# Altium PCB mixer.PcbDoc
Units mm, origin at the board's own origin, x right, y up, seen from the top; angles counter-clockwise.
Board outline 37 x 27 mm, 2 copper layers (Top Layer, Bottom Layer), stack 1.671 mm thick; 24 components, 14 nets, 54 pads, 0 vias.
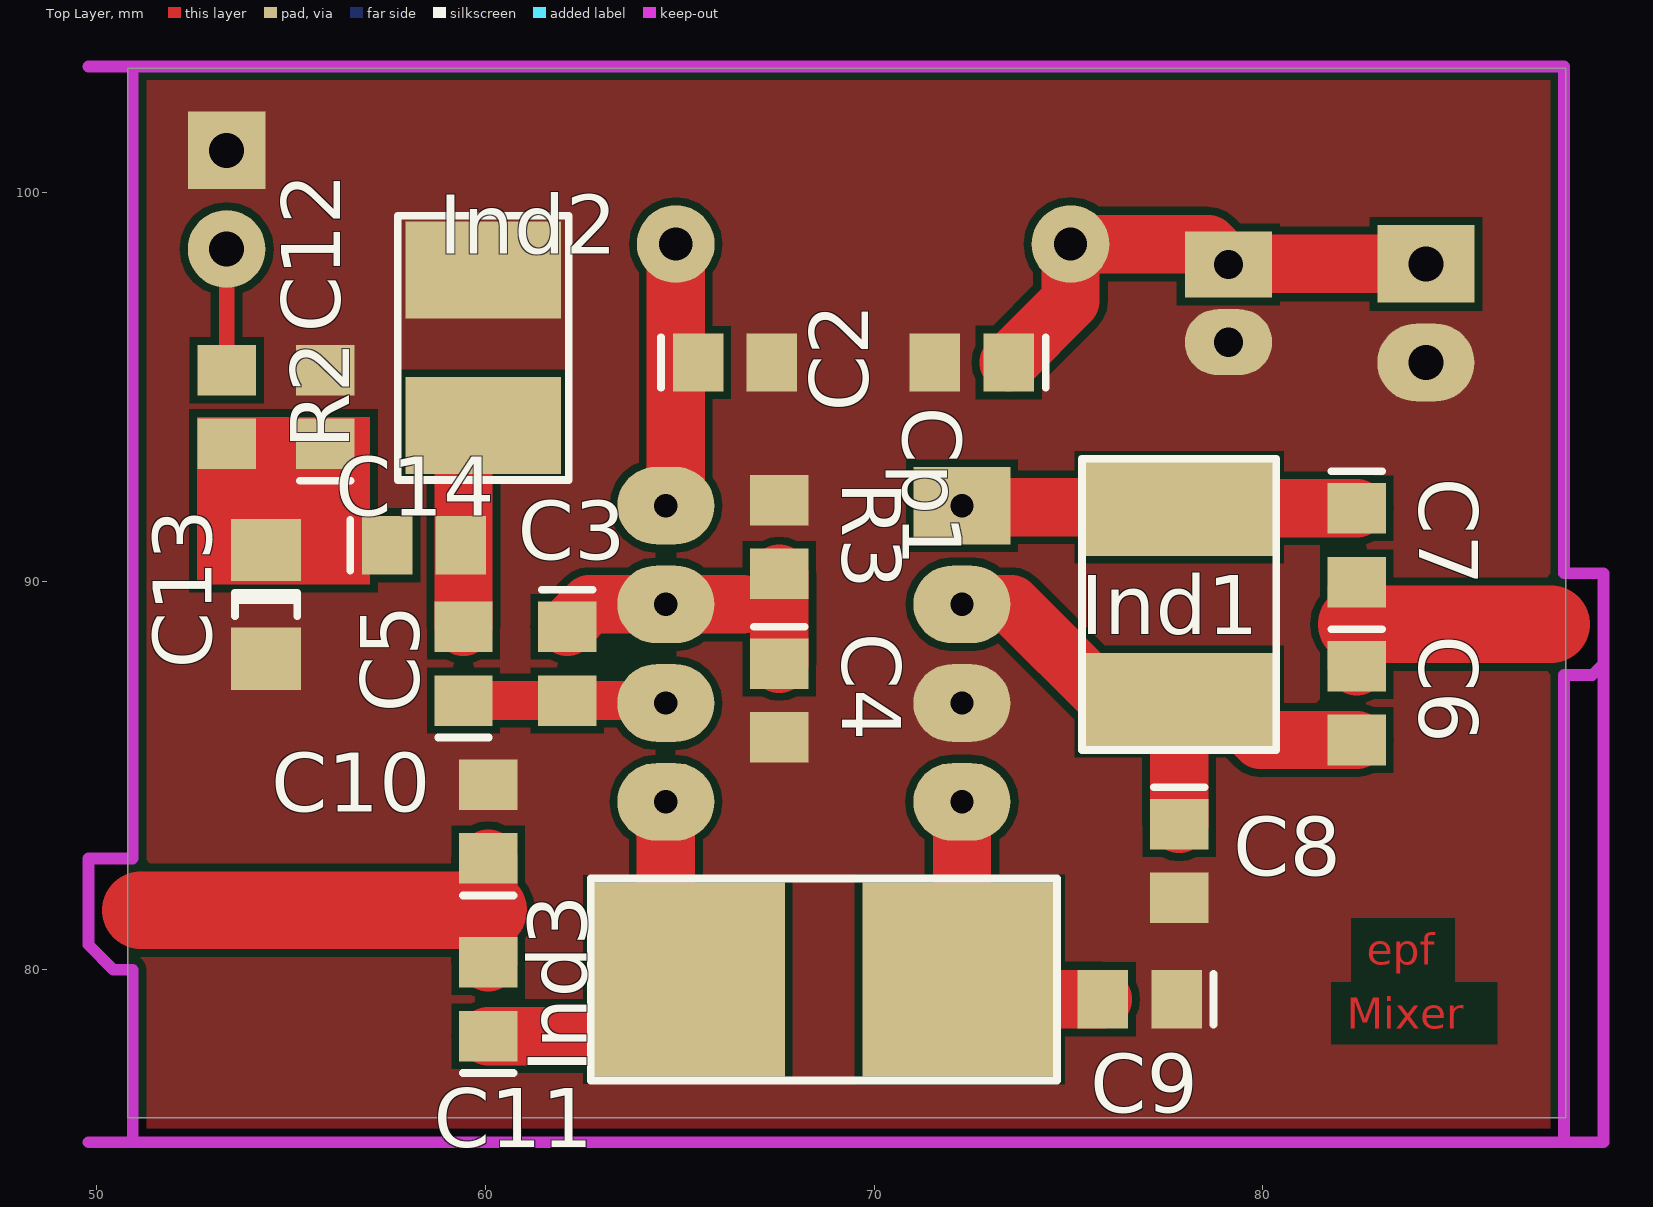
[diagram p0: Top Layer view]
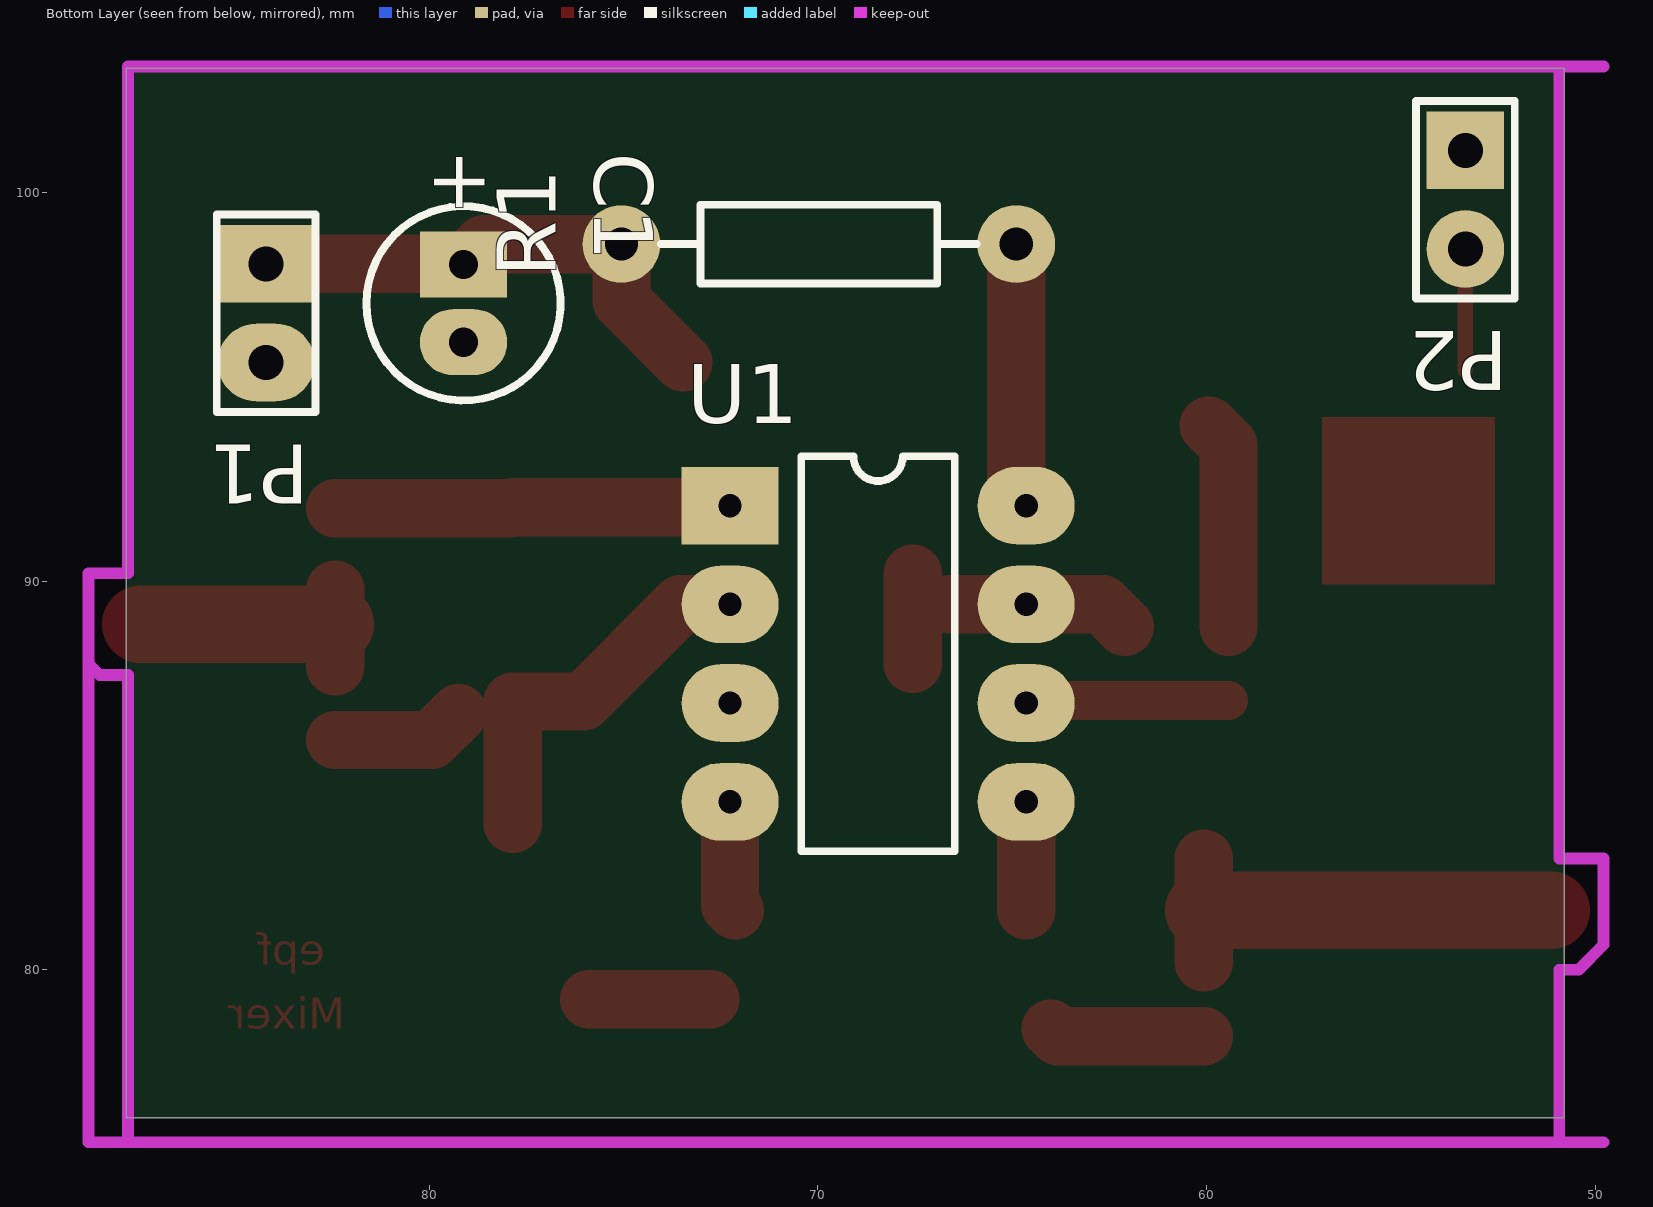
[diagram p1: Bottom Layer view, seen from below]

## Layer stack, top to bottom
Top Layer: signal copper 0.0356
Dielectric: core 1.6, FR-4, Dk 4.8
Bottom Layer: signal copper 0.0356

## Board outline
50.8,76.2 87.8,76.2 87.8,103.2 50.8,103.2

## Design rules (kind name [scope] priority, off if disabled: settings)
Clearance [All] p1: gap=0.2
ComponentClearance [All] p1: gap=0.254 collisioncheckmode=3 verticalgap=0.254
PolygonConnect [All] p1: connectstyle=Direct reliefconductorwidth=0.254 reliefentries=4 polygonreliefangle="90 Angle"
RoomDefinition Mixer [InComponentClass('Mixer')] p1: confinementstyle=ConfineIn formatcopy=TRUE lockcomponents=FALSE outline 49.276,75.184 89.281,75.184 89.281,104.267 49.276,104.267
RoutingVias [All] p1: holewidth=0.6 width=1 viastyle="Through Hole" minholewidth=0.511 minwidth=0.6 maxholewidth=0.9 maxwidth=3
SolderMaskExpansion [All] p1: expansion=0.102
TestPointUsage [All] p1: valid=0 allowmultiple=FALSE
Testpoint [All] p1: side=15 testpointundercomponent=TRUE minsize=1.016 maxsize=2.54 preferedsize=1.524 minholesize=0 maxholesize=1.016 preferedholesize=0.813 testpointgrid=0.025 style=1023 order=0-112345678
Width [All] p1: maxlimit=3 minlimit=0.2 preferedwidth=2
18 further rules are at their usual default settings.

## Components (designator, comment, footprint, x,y, rotation, side; value= is the part's Value field where it differs from the comment)
C1 "Cap Pol1" B 79.121,97.155 r270 bottom
C2 "Cap Pol3" C0805 66.421,95.631 r0 top
C3 "Cap Pol3" C0805 62.103,87.884 r270 top
C4 "Cap Pol3" C0805 67.564,86.934 r270 top
C5 "Cap Pol3" C0805 59.436,87.884 r90 top
C6 "Cap Pol3" C0805 82.423,86.868 r270 top
C7 "Cap Pol3" C0805 82.423,90.932 r270 top
C8 "Cap Pol3" C0805 77.851,82.804 r270 top
C9 "Cap Pol3" C0805 76.835,79.248 r180 top
C10 "Cap Pol3" C0805 60.071,83.82 r90 top
C11 "Cap Pol3" C0805 60.071,79.248 r90 top
C12 "Cap Pol3" C0805 55.88,94.488 r90 top
C13 "Cap Semi" C1206 54.356,89.408 r270 top
C14 "Cap Pol3" C0805 58.42,90.932 r0 top
Cp1 "Cap Pol3" C0805 72.517,95.631 r180 top
Ind1 "Ind2" Ind_5mm 77.851,89.408 r90 top
Ind2 "Ind2" Ind_4mm 59.944,96.012 r270 top
Ind3 "Ind2" IND_7MM 68.707,79.756 r180 top
P1 "Header 2" HDR1X2#1 84.201,98.171 r270 bottom
P2 "Header 2" HDR1X2#2 53.34,101.092 r270 bottom
R1 "Res2" AXIAL-0.4 69.977,98.679 r0 bottom
R2 "Res Semi" 2012[0805] 53.34,94.488 r270 top
R3 "Res Semi" 2012[0805] 67.564,91.144 r270 top
U1 "SA602" SA602 72.263,91.948 r180 bottom

## Footprints (in the part's own frame and the unit in brackets; to place one, negate y for a bottom-side part, rotate by r counter-clockwise, add the part's x,y. Pads: shape width x height; smd on the part's side, far side on the other; paste and mask are expansions set on the pad)
2012[0805] [mm] "Chip Resistor; Body 2.0 x 1.3 mm (LxW typ)"
  rect 1.3x1.5 smd: 1(-0.95,0) 2(0.95,0)
AXIAL-0.4 [mm] "Resistor; 2 Leads"
  round 2 hole 0.85: 1(-5.08,0) 2(5.08,0)
  silkscreen extent -4.06,-1.02 4.06,1.02
B [mm] "Capacitor, Electrolytic, Radial; Body 5 x 6.8 mm (Dia.xH typ); Pin Spacing 2 mm (typ)"
  rect 1.7x2.25 hole 0.75: 1(-1,0)
  oval 1.7x2.25 hole 0.75: 2(1,0)
  silkscreen extent -2.5,-2.5 2.5,2.5
C0805 [mm] "Chip Capacitor; Body 2.0 x 1.2 mm (LxW typ)"
  rect 1.3x1.5 smd: 1(-0.95,0) 2(0.95,0)
  silkscreen extent -1.9,-0.65 -1.9,0.65
C1206 [mm] "Chip Capacitor; Body 3.2 x 1.6 mm (LxW typ)"
  rect 1.6x1.8 smd: 1(-1.4,0) 2(1.4,0)
  silkscreen extent -0.3,-0.8 0.3,0.8
HDR1X2#1 [mm] "Connector; Header; 2 Position"
  rect 2x2.5 hole 0.9: 1(0,0)
  oval 2x2.5 hole 0.9: 2(2.54,0)
  silkscreen extent -1.27,-1.27 3.81,1.27
HDR1X2#2 [mm] "Connector; Header; 2 Position"
  rect 2x2 hole 0.9: 1(0,0)
  round 2 hole 0.9: 2(2.54,0)
  silkscreen extent -1.27,-1.27 3.81,1.27
Ind_4mm [mm]
  rect 2.5x4 smd: 1(-2,0) 2(2,0)
  silkscreen extent -3.4,-2.2 3.4,2.2
Ind_5mm [mm]
  rect 2.5x5 smd: 1(-2.5,0) 2(2.5,0)
  silkscreen extent -3.75,-2.5 3.75,2.5
IND_7MM [mm]
  rect 5x5 smd: 1(-3.5,0) 2(3.5,0)
  silkscreen extent -6,-2.6 6,2.6
SA602 [mm]
  rect 2.5x2 hole 0.6: 1(0,0)
  oval 2.5x2 hole 0.6: 2(0,-2.54) 3(0,-5.08) 4(0,-7.62) 5(7.62,-7.62) 6(7.62,-5.08) 7(7.62,-2.54) 8(7.62,0)
  silkscreen extent 1.84,-8.89 5.78,1.27

## Part data
C1: "Polarized Capacitor (Radial)"
C2 C3 C4 C5 C6 C7 C8 C9 C10 C11 C12 C14 Cp1: "Polarized Capacitor (Surface Mount)"
C13: "Capacitor (Semiconductor SIM Model)"
P1 P2: "Header, 2-Pin"
R1: "Resistor"
R2 R3: "Semiconductor Resistor"
U1: library part SA602A

## Nets (pads, with @x,y where several pads share a name; then routed paths per layer and width w, separated by ;. In a path a pad name is that pad's centre, name@x,y a point inside that pad or via, vN(x,y) a via of type N, cw(c..) or ccw(c..) an arc to the next point about the centre after c; other vN are vias at no path point)
GND: C1.2 C2.2 C4.2 C8.2 C9.1 C10.2 C12.2 C13.2 Cp1.2 Ind2.1 P1.2 P2.1 R3.1 U1.3
IN: C6.1 C7.2 | length 7
  Top Layer w1.5: C6.1 C7.2@82.423,89.789
  Top Layer w2: 82.423,88.9 87.423,88.9
NetC2_1: C2.1 R1.1 U1.8 | length 6.8
  Top Layer w1.5: U1.8 64.897,92.202 R1.1
NetC3_1: C3.1 C4.1 R3.2 U1.7 | length 7.1
  Top Layer w1.5: C3.1 62.677,89.408 66.609,89.408 ; C4.1 R3.2
NetC3_2: C3.2 C5.1 U1.6 | length 5.2
  Top Layer w1: C5.1 64.577,86.934 U1.6
NetC5_2: C5.2 C14.2 Ind2.2 | length 5.5
  Top Layer w1: C14.2 C14.2@59.436,90.866
  Top Layer w1.5: C5.2 59.436,93.504 Ind2.2
NetC6_2: C6.2 C8.1 Ind1.1 U1.2 | length 13.2
  Top Layer w1.5: U1.2 73.533,89.408 76.033,86.908 Ind1.1 C8.1 ; Ind1.1@79.248,86.614 79.944,85.918 C6.2
NetC7_1: C7.1 Ind1.2 U1.1 | length 10.2
  Top Layer w1.5: U1.1 72.303,91.908 Ind1.2 77.877,91.882 C7.1
NetC9_2: C9.2 Ind3.1 U1.4 | length 6
  Top Layer w1.5: Ind3.1@72.136,81.534 72.263,81.661 U1.4 ; Ind3.1@72.771,79.248 C9.2
NetC11_1: C11.1 Ind3.2 U1.5 | length 6.8
  Top Layer w1.5: C11.1 63.82,78.298 Ind3.2@64.008,78.486 ; Ind3.2@64.643,81.534 U1.5
NetC12_1: C12.1 C13.1 C14.1 R2.2
NetP2_2: P2.2 R2.1 | length 3.7
  Top Layer w0.4: R2.1 P2.2 P2.2@53.782,98.994
OUT: C10.1 C11.2 | length 11.6
  Top Layer w1.5: C11.2 C10.1
  Top Layer w2: 51.134,81.534 60.071,81.534
VCC: C1.1 Cp1.1 P1.1 R1.2 | length 13.1
  Top Layer w1.5: Cp1.1 75.057,97.221 R1.2 78.597,98.679 C1.1 79.137,98.171 P1.1

## Polygon pours and split planes (outlines as drawn)
GND on Top Layer (solid, remove dead copper): 50.419,104.14 50.419,74.803 88.9,74.803 88.9,104.013

## Keep-outs
Keep-Out Layer:
  lines w0.3: 49.784,75.565 88.773,75.565 88.773,90.208 87.757,90.208 87.757,103.251 49.784,103.251 ; 50.927,75.565 50.927,80.01 50.419,80.01 49.784,80.645 49.784,82.868 50.07,82.868 50.641,82.868 50.927,82.868 50.927,83.566 50.927,103.251 ; 87.757,75.565 87.757,87.592 88.481,87.592 88.773,87.884 ; 88.773,87.122 88.773,87.249

## Other copper
Top Layer:
  rectangle net NetC12_1: 52.578,89.916 57.023,94.234
  text "epf" at 82.677,80.137 h0.8
  text "Mixer" at 82.169,78.486 h0.8

## Silkscreen, mask and mechanical layers (free items; w line width, h text height)
Drill Drawing:
  text ".LEGEND" at 92.88,81.28 h1.52
  text "Drill Drawing." at 94.488,79.629 h1.52

## Dimensions
49.784,75.565 to 88.773,75.565 on Mechanical 1
49.784,75.565 to 49.784,103.251 on Mechanical 1

## Text inside footprints (layer, text, board x,y; h text height)
C1: Bottom Overlay "+" at 79.871,101.13 h1.5 r90